# EAGLE board Top_rev1 (EAGLE 6.3)
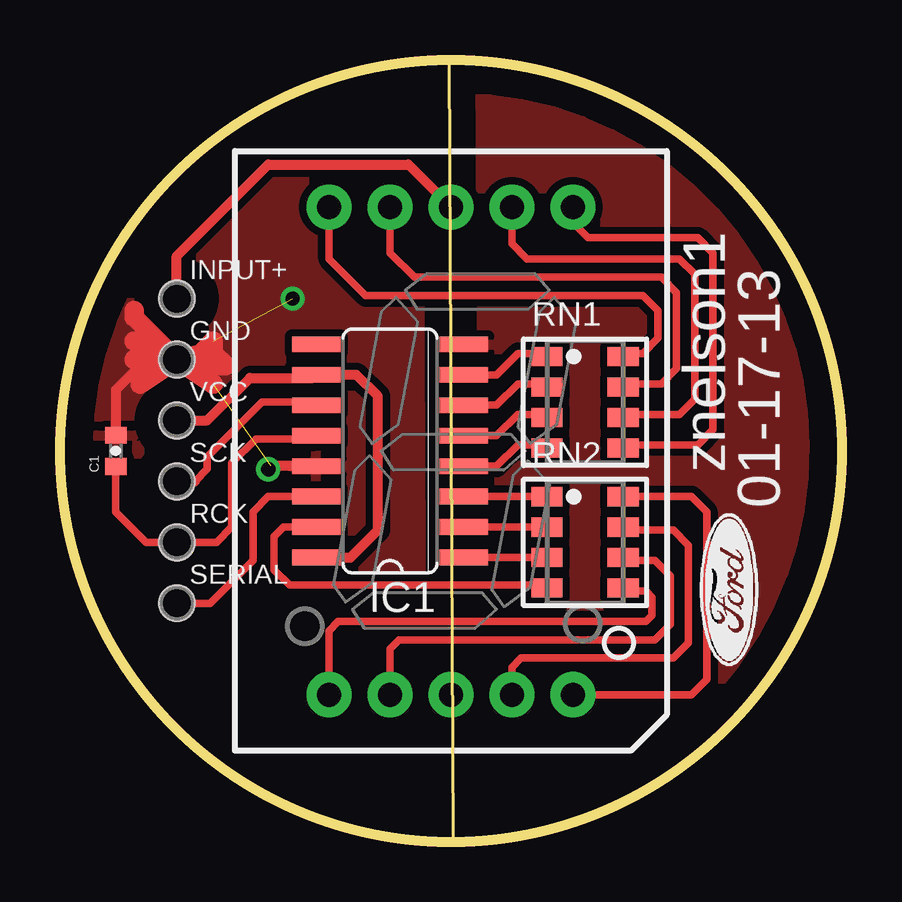
[diagram p0: board, top side]

Size 32.6 x 32.6 mm. Coordinates in mm from the lower left corner, seen from the top.
Outline: circle at 16.3,16.3 radius 16.3
Copper layers (1*16): Top 0.035mm / dielectric 1.5mm / Bottom 0.035mm
Design rules "default": minimum track width 10mil, minimum drill 24mil, track to track 8mil, track to pad 8mil, pad to pad 8mil, via to via 8mil, smd to smd 8mil, copper to edge 40mil, drill to drill 8mil, minimum pad ring 10mil, minimum via ring 8mil, stop-mask expansion 4mil, vias tented up to drill 0mil, thermal gap 10mil

## Footprints (pad centres in the part's own frame; a part is rotated, then mirrored left to right if it is on the bottom)
0402-CAP = smd 0.7 x 0.9: 1 -0.65,0; 2 0.65,0
SO16 = smd 0.66 x 2.032: 1 -4.445,-3.073; 2 -3.175,-3.073; 3 -1.905,-3.073; 4 -0.635,-3.073; 5 0.635,-3.073; 6 1.905,-3.073; 7 3.175,-3.073; 8 4.445,-3.073; 9 4.445,3.073; 10 3.175,3.073; 11 1.905,3.073; 12 0.635,3.073; 13 -0.635,3.073; 14 -1.905,3.073; 15 -3.175,3.073; 16 -4.445,3.073
1X06_HOLES_ONLY = drill 0.889 pad 0.813: 1 0,0; 2 2.54,0; 3 5.08,0; 4 7.62,0; 5 10.16,0; 6 12.7,0 | hole 1.473: 0,0; 2.54,0; 5.08,0; 7.62,0; 10.16,0; 12.7,0
744-8 = smd 0.8 x 1.3: 1 -1.905,-1.587; 2 -0.635,-1.587; 3 0.635,-1.587; 4 1.905,-1.587; 5 1.905,1.587; 6 0.635,1.587; 7 -0.635,1.587; 8 -1.905,1.587
7-SEGMENT-1"PTH = drill 1 pad 1.88: 1 -5.08,-10.16; 2 -2.54,-10.16; 3 0,-10.16; 4 2.54,-10.16; 5 5.08,-10.16; 6 5.08,10.16; 7 2.54,10.16; 8 0,10.16; 9 -2.54,10.16; 10 -5.08,10.16

## Placement (x,y rotation side)
C1  0.1uF  [0402-CAP]  2.33,16.3 90 top
IC1  74HC595D  [SO16]  13.76,16.3 90 top
JP1  6 PIN 90degree Header  [1X06_HOLES_ONLY]  4.87,22.65 270 top
RN1  220  [744-8]  21.89,18.33 270 top
RN2  220  [744-8]  21.89,12.49 270 top
U$1  7-SEGMENT-DISPLAY-1"-RED  [7-SEGMENT-1"PTH]  16.3,16.3 0 top

## Library data of the parts
C1 = SparkFun-Capacitors
IC1 = 74xx-eu
JP1 = SparkFun-Connectors
RN1 RN2 = resistor-array
U$1 = SparkFun-Displays

## Nets
GND: C1.2 IC1.8 IC1.13 JP1.2
INPUT+: JP1.1 U$1.8
N$1: RN2.8 U$1.5
N$2: IC1.1 RN2.3
N$3: RN2.5 U$1.1
N$4: IC1.2 RN2.2
N$5: IC1.3 RN2.1
N$7: RN2.7 U$1.4
N$8: RN1.5 U$1.6
N$9: IC1.15 RN2.4
N$10: IC1.4 RN1.4
N$11: IC1.5 RN1.3
N$12: IC1.6 RN1.2
N$13: IC1.7 RN1.1
N$14: RN1.6 U$1.7
N$15: RN1.7 U$1.9
N$16: RN1.8 U$1.10
N$19: RN2.6 U$1.2
NC1: U$1.3
NC2: IC1.9
RCK: C1.1 IC1.12 JP1.5
SCK: IC1.11 JP1.4
SERIAL: IC1.14 JP1.6
VCC: IC1.10 IC1.16 JP1.3

## Tracks (layer width: path | path; a pad name or v marks a point on that pad's centre or on a via)
GND  (via drill 0.6)  (2 unrouted)
  Top 0.406: IC1.13 8.81,15.66 8.68,15.54 | JP1.2 3.6,20.11 2.33,18.84 C1.2
  Top 0.813: 3.09,20.11 JP1.2 | JP1.2 3.09,20.87 4.11,19.86 6.9,19.86 6.39,20.36 6.39,20.87 5.89,20.36 JP1.2 | JP1.2 6.39,19.09 5.38,20.11 JP1.2 | JP1.2 3.35,19.09 3.35,19.35 4.11,20.11 JP1.2 | JP1.2 3.09,21.89 3.09,22.14
  other vias: 9.7,22.65
  pour Top (isolate 0.305): 1.57,16.3 arc-90 16.3,31.03 16.55,31.03 arc-90 31.03,16.55 arc-90 16.3,1.31 arc-91
INPUT+
  Top 0.406: U$1.8 14.52,28.24 8.68,28.24 4.87,24.43 JP1.1
N$1
  Top 0.305: RN2.8 26.33,14.39 26.97,13.76 26.97,6.78 26.33,6.14 U$1.5
N$2
  Top 0.305: IC1.1 RN2.3
N$3
  Top 0.305: U$1.1 11.22,8.81 11.6,9.19 24.43,9.19 24.68,9.44 24.68,10.2 24.43,10.46 23.73,10.46 RN2.5
N$4
  Top 0.305: RN2.2 IC1.2
N$5
  Top 0.305: IC1.3 RN2.1 20.43,14.52
N$6  (via drill 0.6)
  other vias: 8.68,15.54
N$7
  Top 0.305: U$1.4 18.84,7.28 19.22,7.66 25.57,7.66 26.21,8.3 26.21,12.36 25.57,13 23.48,13 RN2.7
N$8
  Top 0.254: 23.73,16.55 RN1.5
  Top 0.305: U$1.6 21.38,25.82 22.02,25.19 26.59,25.19 27.22,24.55 27.22,17.19 26.59,16.55 23.73,16.55
N$9
  Top 0.305: IC1.15 9.31,13.12 8.93,12.74 8.93,11.35 9.57,10.71 20.43,10.71 RN2.4
N$10
  Top 0.305: IC1.4 18.2,15.66 19.09,16.55 20.43,16.55
  Top 0.406: 20.43,16.55 RN1.4
N$11
  Top 0.254: 20.43,17.82 RN1.3
  Top 0.305: IC1.5 18.2,16.93 19.09,17.82 20.43,17.82
N$12
  Top 0.254: 20.43,19.09 RN1.2
  Top 0.305: IC1.6 18.2,18.2 19.09,19.09 20.43,19.09
N$13
  Top 0.254: 20.43,20.36 RN1.1
  Top 0.305: IC1.7 18.2,19.47 19.09,20.36 20.43,20.36
N$14
  Top 0.254: 23.73,17.82 RN1.6
  Top 0.305: U$1.7 18.84,24.94 19.47,24.3 25.82,24.3 26.46,23.67 26.46,18.46 25.82,17.82 23.73,17.82
N$15
  Top 0.254: 23.73,19.09 RN1.7
  Top 0.305: U$1.9 13.76,24.55 14.78,23.54 25.06,23.54 25.7,22.9 25.7,19.73 25.06,19.09 23.73,19.09
N$16
  Top 0.254: 23.73,20.36 RN1.8
  Top 0.305: 23.73,20.36 24.3,20.36 24.94,21 24.94,22.14 24.3,22.78 12.74,22.78 11.22,24.3 U$1.10
N$19
  Top 0.305: U$1.2 13.76,8.04 14.14,8.43 24.81,8.43 25.44,9.06 25.44,11.09 24.81,11.73 23.73,11.73 RN2.6
RCK
  Top 0.305: 10.56,16.81 8.17,16.81 7.16,15.79 7.16,13.12 6.52,12.49 JP1.5 3.6,12.49 2.33,13.76 C1.1
  Top 0.406: 10.56,16.81 IC1.12
SCK
  Top 0.305: 5.63,15.03 6.14,15.54 6.14,16.05 8.43,18.33 10.56,18.33
  Top 0.406: JP1.4 5.63,15.03 | 10.56,18.33 IC1.11
SERIAL
  Top 0.305: JP1.6 6.27,9.95 8.04,11.73 8.04,13.76 8.68,14.39 IC1.14
VCC
  Top 0.406: IC1.16 12.11,11.86 13.25,13 13.25,18.59 12.36,19.47 IC1.10 10.56,19.35 7.92,19.35 6.14,17.57 JP1.3

## Text on the board
tPlace: znelson1 | INPUT+ | 01-17-13 | GND | VCC | SCK | RCK | SERIAL